# EAGLE board 16x16_3mm_3.2x3.2_skewed_headers_multiplexed (EAGLE 6.0)
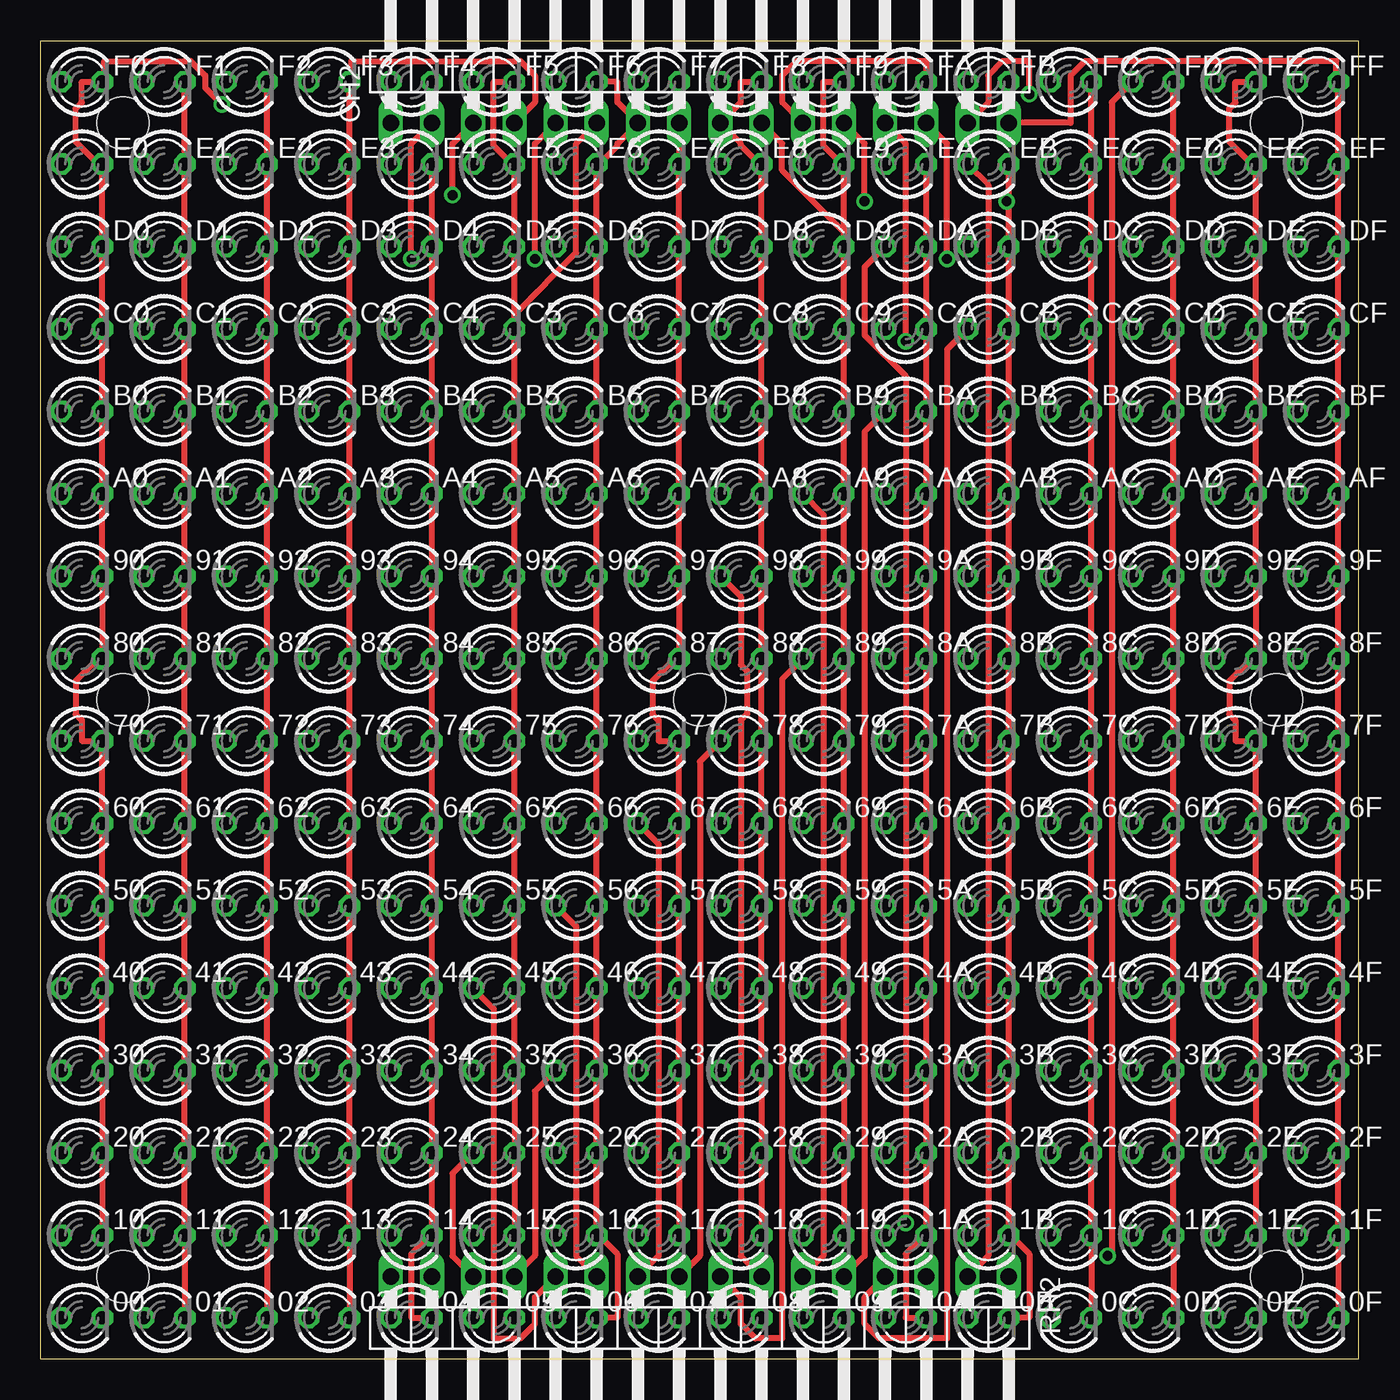
[diagram p0: board, top side]
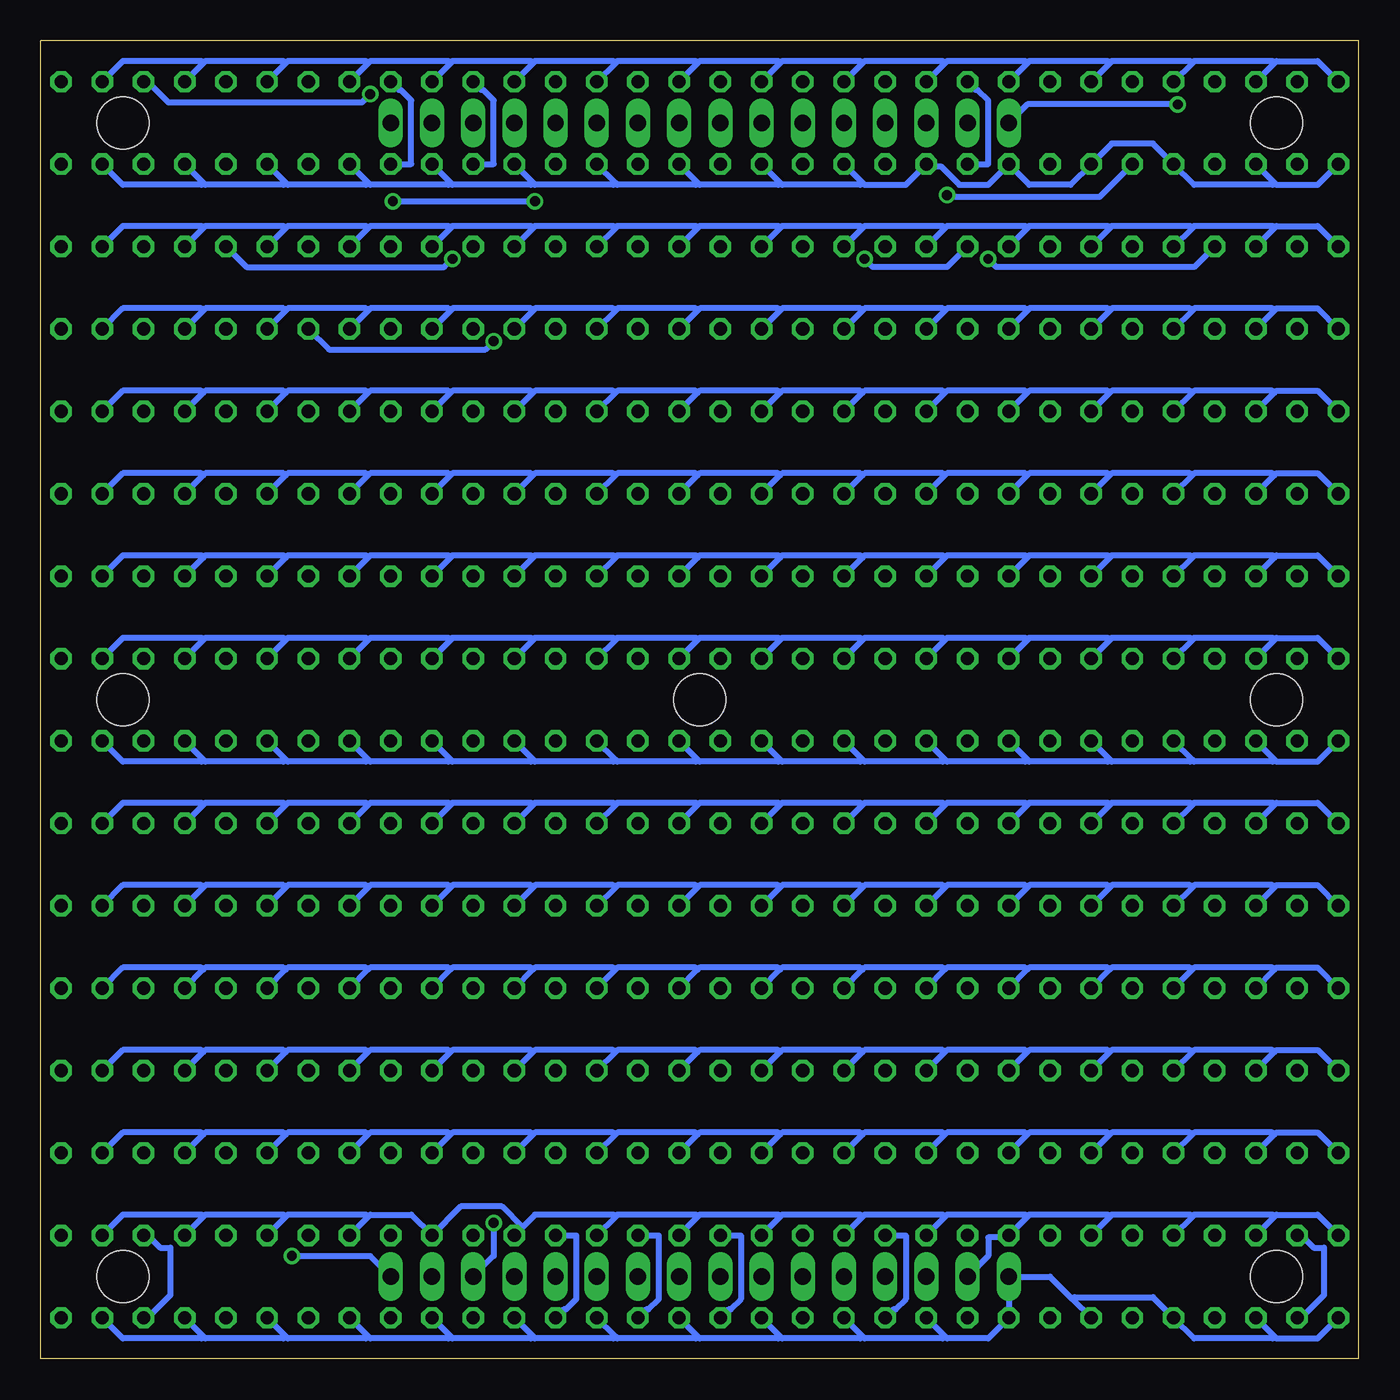
[diagram p1: board, bottom side, seen from below]

Size 81.28 x 81.28 mm. Coordinates in mm from the lower left corner, seen from the top.
Outline: 0,0 0,81.28 81.28,81.28 81.28,0 0,0
Copper layers (1*16): Top 0.035mm / dielectric 1.5mm / Bottom 0.035mm
Design rules: minimum track width 15mil, minimum drill 24mil, track to track 12mil, track to pad 12mil, pad to pad 8mil, via to via 8mil, smd to smd 8mil, copper to edge 40mil, drill to drill 8mil, minimum pad ring 10mil, minimum via ring 8mil, stop-mask expansion 4mil, vias tented up to drill 0mil, thermal gap 10mil
Holes 3.2 mm at 5.08,76.2 76.2,76.2 76.2,5.08 5.08,5.08 5.08,40.64 76.2,40.64 40.64,40.64

## Footprints (pad centres in the part's own frame; a part is rotated, then mirrored left to right if it is on the bottom)
LED3MM = drill 0.813 octagon: A -1.27,0; K 1.27,0
1X16/90 = drill 1.016 long: 1 -19.05,-3.81; 2 -16.51,-3.81; 3 -13.97,-3.81; 4 -11.43,-3.81; 5 -8.89,-3.81; 6 -6.35,-3.81; 7 -3.81,-3.81; 8 -1.27,-3.81; 9 1.27,-3.81; 10 3.81,-3.81; 11 6.35,-3.81; 12 8.89,-3.81; 13 11.43,-3.81; 14 13.97,-3.81; 15 16.51,-3.81; 16 19.05,-3.81

## Placement (x,y rotation side)
00  [LED3MM]  2.54,2.54 0 top
0A  [LED3MM]  53.34,2.54 0 top
0B  [LED3MM]  58.42,2.54 0 top
0C  [LED3MM]  63.5,2.54 0 top
0D  [LED3MM]  68.58,2.54 0 top
0E  [LED3MM]  73.66,2.54 0 top
0F  [LED3MM]  78.74,2.54 0 top
01  [LED3MM]  7.62,2.54 0 top
1A  [LED3MM]  53.34,7.62 0 top
1B  [LED3MM]  58.42,7.62 0 top
1C  [LED3MM]  63.5,7.62 0 top
1D  [LED3MM]  68.58,7.62 0 top
1E  [LED3MM]  73.66,7.62 0 top
1F  [LED3MM]  78.74,7.62 0 top
02  [LED3MM]  12.7,2.54 0 top
2A  [LED3MM]  53.34,12.7 0 top
2B  [LED3MM]  58.42,12.7 0 top
2C  [LED3MM]  63.5,12.7 0 top
2D  [LED3MM]  68.58,12.7 0 top
2E  [LED3MM]  73.66,12.7 0 top
2F  [LED3MM]  78.74,12.7 0 top
03  [LED3MM]  17.78,2.54 0 top
3A  [LED3MM]  53.34,17.78 0 top
3B  [LED3MM]  58.42,17.78 0 top
3C  [LED3MM]  63.5,17.78 0 top
3D  [LED3MM]  68.58,17.78 0 top
3E  [LED3MM]  73.66,17.78 0 top
3F  [LED3MM]  78.74,17.78 0 top
04  [LED3MM]  22.86,2.54 0 top
4A  [LED3MM]  53.34,22.86 0 top
4B  [LED3MM]  58.42,22.86 0 top
4C  [LED3MM]  63.5,22.86 0 top
4D  [LED3MM]  68.58,22.86 0 top
4E  [LED3MM]  73.66,22.86 0 top
4F  [LED3MM]  78.74,22.86 0 top
05  [LED3MM]  27.94,2.54 0 top
5A  [LED3MM]  53.34,27.94 0 top
5B  [LED3MM]  58.42,27.94 0 top
5C  [LED3MM]  63.5,27.94 0 top
5D  [LED3MM]  68.58,27.94 0 top
5E  [LED3MM]  73.66,27.94 0 top
5F  [LED3MM]  78.74,27.94 0 top
06  [LED3MM]  33.02,2.54 0 top
6A  [LED3MM]  53.34,33.02 0 top
6B  [LED3MM]  58.42,33.02 0 top
6C  [LED3MM]  63.5,33.02 0 top
6D  [LED3MM]  68.58,33.02 0 top
6E  [LED3MM]  73.66,33.02 0 top
6F  [LED3MM]  78.74,33.02 0 top
07  [LED3MM]  38.1,2.54 0 top
7A  [LED3MM]  53.34,38.1 0 top
7B  [LED3MM]  58.42,38.1 0 top
7C  [LED3MM]  63.5,38.1 0 top
7D  [LED3MM]  68.58,38.1 0 top
7E  [LED3MM]  73.66,38.1 0 top
7F  [LED3MM]  78.74,38.1 0 top
08  [LED3MM]  43.18,2.54 0 top
8A  [LED3MM]  53.34,43.18 0 top
8B  [LED3MM]  58.42,43.18 0 top
8C  [LED3MM]  63.5,43.18 0 top
8D  [LED3MM]  68.58,43.18 0 top
8E  [LED3MM]  73.66,43.18 0 top
8F  [LED3MM]  78.74,43.18 0 top
09  [LED3MM]  48.26,2.54 0 top
9A  [LED3MM]  53.34,48.26 0 top
9B  [LED3MM]  58.42,48.26 0 top
9C  [LED3MM]  63.5,48.26 0 top
9D  [LED3MM]  68.58,48.26 0 top
9E  [LED3MM]  73.66,48.26 0 top
9F  [LED3MM]  78.74,48.26 0 top
10  [LED3MM]  2.54,7.62 0 top
11  [LED3MM]  7.62,7.62 0 top
12  [LED3MM]  12.7,7.62 0 top
13  [LED3MM]  17.78,7.62 0 top
14  [LED3MM]  22.86,7.62 0 top
15  [LED3MM]  27.94,7.62 0 top
16  [LED3MM]  33.02,7.62 0 top
17  [LED3MM]  38.1,7.62 0 top
18  [LED3MM]  43.18,7.62 0 top
19  [LED3MM]  48.26,7.62 0 top
20  [LED3MM]  2.54,12.7 0 top
21  [LED3MM]  7.62,12.7 0 top
22  [LED3MM]  12.7,12.7 0 top
23  [LED3MM]  17.78,12.7 0 top
24  [LED3MM]  22.86,12.7 0 top
25  [LED3MM]  27.94,12.7 0 top
26  [LED3MM]  33.02,12.7 0 top
27  [LED3MM]  38.1,12.7 0 top
28  [LED3MM]  43.18,12.7 0 top
29  [LED3MM]  48.26,12.7 0 top
30  [LED3MM]  2.54,17.78 0 top
31  [LED3MM]  7.62,17.78 0 top
32  [LED3MM]  12.7,17.78 0 top
33  [LED3MM]  17.78,17.78 0 top
34  [LED3MM]  22.86,17.78 0 top
35  [LED3MM]  27.94,17.78 0 top
36  [LED3MM]  33.02,17.78 0 top
37  [LED3MM]  38.1,17.78 0 top
38  [LED3MM]  43.18,17.78 0 top
39  [LED3MM]  48.26,17.78 0 top
40  [LED3MM]  2.54,22.86 0 top
41  [LED3MM]  7.62,22.86 0 top
42  [LED3MM]  12.7,22.86 0 top
43  [LED3MM]  17.78,22.86 0 top
44  [LED3MM]  22.86,22.86 0 top
45  [LED3MM]  27.94,22.86 0 top
46  [LED3MM]  33.02,22.86 0 top
47  [LED3MM]  38.1,22.86 0 top
48  [LED3MM]  43.18,22.86 0 top
49  [LED3MM]  48.26,22.86 0 top
50  [LED3MM]  2.54,27.94 0 top
51  [LED3MM]  7.62,27.94 0 top
52  [LED3MM]  12.7,27.94 0 top
53  [LED3MM]  17.78,27.94 0 top
54  [LED3MM]  22.86,27.94 0 top
55  [LED3MM]  27.94,27.94 0 top
56  [LED3MM]  33.02,27.94 0 top
57  [LED3MM]  38.1,27.94 0 top
58  [LED3MM]  43.18,27.94 0 top
59  [LED3MM]  48.26,27.94 0 top
60  [LED3MM]  2.54,33.02 0 top
61  [LED3MM]  7.62,33.02 0 top
62  [LED3MM]  12.7,33.02 0 top
63  [LED3MM]  17.78,33.02 0 top
64  [LED3MM]  22.86,33.02 0 top
65  [LED3MM]  27.94,33.02 0 top
66  [LED3MM]  33.02,33.02 0 top
67  [LED3MM]  38.1,33.02 0 top
68  [LED3MM]  43.18,33.02 0 top
69  [LED3MM]  48.26,33.02 0 top
70  [LED3MM]  2.54,38.1 0 top
71  [LED3MM]  7.62,38.1 0 top
72  [LED3MM]  12.7,38.1 0 top
73  [LED3MM]  17.78,38.1 0 top
74  [LED3MM]  22.86,38.1 0 top
75  [LED3MM]  27.94,38.1 0 top
76  [LED3MM]  33.02,38.1 0 top
77  [LED3MM]  38.1,38.1 0 top
78  [LED3MM]  43.18,38.1 0 top
79  [LED3MM]  48.26,38.1 0 top
80  [LED3MM]  2.54,43.18 0 top
81  [LED3MM]  7.62,43.18 0 top
82  [LED3MM]  12.7,43.18 0 top
83  [LED3MM]  17.78,43.18 0 top
84  [LED3MM]  22.86,43.18 0 top
85  [LED3MM]  27.94,43.18 0 top
86  [LED3MM]  33.02,43.18 0 top
87  [LED3MM]  38.1,43.18 0 top
88  [LED3MM]  43.18,43.18 0 top
89  [LED3MM]  48.26,43.18 0 top
90  [LED3MM]  2.54,48.26 0 top
91  [LED3MM]  7.62,48.26 0 top
92  [LED3MM]  12.7,48.26 0 top
93  [LED3MM]  17.78,48.26 0 top
94  [LED3MM]  22.86,48.26 0 top
95  [LED3MM]  27.94,48.26 0 top
96  [LED3MM]  33.02,48.26 0 top
97  [LED3MM]  38.1,48.26 0 top
98  [LED3MM]  43.18,48.26 0 top
99  [LED3MM]  48.26,48.26 0 top
A0  [LED3MM]  2.54,53.34 0 top
A1  [LED3MM]  7.62,53.34 0 top
A2  [LED3MM]  12.7,53.34 0 top
A3  [LED3MM]  17.78,53.34 0 top
A4  [LED3MM]  22.86,53.34 0 top
A5  [LED3MM]  27.94,53.34 0 top
A6  [LED3MM]  33.02,53.34 0 top
A7  [LED3MM]  38.1,53.34 0 top
A8  [LED3MM]  43.18,53.34 0 top
A9  [LED3MM]  48.26,53.34 0 top
AA  [LED3MM]  53.34,53.34 0 top
AB  [LED3MM]  58.42,53.34 0 top
AC  [LED3MM]  63.5,53.34 0 top
AD  [LED3MM]  68.58,53.34 0 top
AE  [LED3MM]  73.66,53.34 0 top
AF  [LED3MM]  78.74,53.34 0 top
B0  [LED3MM]  2.54,58.42 0 top
B1  [LED3MM]  7.62,58.42 0 top
B2  [LED3MM]  12.7,58.42 0 top
B3  [LED3MM]  17.78,58.42 0 top
B4  [LED3MM]  22.86,58.42 0 top
B5  [LED3MM]  27.94,58.42 0 top
B6  [LED3MM]  33.02,58.42 0 top
B7  [LED3MM]  38.1,58.42 0 top
B8  [LED3MM]  43.18,58.42 0 top
B9  [LED3MM]  48.26,58.42 0 top
BA  [LED3MM]  53.34,58.42 0 top
BB  [LED3MM]  58.42,58.42 0 top
BC  [LED3MM]  63.5,58.42 0 top
BD  [LED3MM]  68.58,58.42 0 top
BE  [LED3MM]  73.66,58.42 0 top
BF  [LED3MM]  78.74,58.42 0 top
C0  [LED3MM]  2.54,63.5 0 top
C1  [LED3MM]  7.62,63.5 0 top
C2  [LED3MM]  12.7,63.5 0 top
C3  [LED3MM]  17.78,63.5 0 top
C4  [LED3MM]  22.86,63.5 0 top
C5  [LED3MM]  27.94,63.5 0 top
C6  [LED3MM]  33.02,63.5 0 top
C7  [LED3MM]  38.1,63.5 0 top
C8  [LED3MM]  43.18,63.5 0 top
C9  [LED3MM]  48.26,63.5 0 top
CA  [LED3MM]  53.34,63.5 0 top
CB  [LED3MM]  58.42,63.5 0 top
CC  [LED3MM]  63.5,63.5 0 top
CD  [LED3MM]  68.58,63.5 0 top
CE  [LED3MM]  73.66,63.5 0 top
CF  [LED3MM]  78.74,63.5 0 top
CH2  [1X16/90]  40.64,80.01 0 top
D0  [LED3MM]  2.54,68.58 0 top
D1  [LED3MM]  7.62,68.58 0 top
D2  [LED3MM]  12.7,68.58 0 top
D3  [LED3MM]  17.78,68.58 0 top
D4  [LED3MM]  22.86,68.58 0 top
D5  [LED3MM]  27.94,68.58 0 top
D6  [LED3MM]  33.02,68.58 0 top
D7  [LED3MM]  38.1,68.58 0 top
D8  [LED3MM]  43.18,68.58 0 top
D9  [LED3MM]  48.26,68.58 0 top
DA  [LED3MM]  53.34,68.58 0 top
DB  [LED3MM]  58.42,68.58 0 top
DC  [LED3MM]  63.5,68.58 0 top
DD  [LED3MM]  68.58,68.58 0 top
DE  [LED3MM]  73.66,68.58 0 top
DF  [LED3MM]  78.74,68.58 0 top
E0  [LED3MM]  2.54,73.66 0 top
E1  [LED3MM]  7.62,73.66 0 top
E2  [LED3MM]  12.7,73.66 0 top
E3  [LED3MM]  17.78,73.66 0 top
E4  [LED3MM]  22.86,73.66 0 top
E5  [LED3MM]  27.94,73.66 0 top
E6  [LED3MM]  33.02,73.66 0 top
E7  [LED3MM]  38.1,73.66 0 top
E8  [LED3MM]  43.18,73.66 0 top
E9  [LED3MM]  48.26,73.66 0 top
EA  [LED3MM]  53.34,73.66 0 top
EB  [LED3MM]  58.42,73.66 0 top
EC  [LED3MM]  63.5,73.66 0 top
ED  [LED3MM]  68.58,73.66 0 top
EE  [LED3MM]  73.66,73.66 0 top
EF  [LED3MM]  78.74,73.66 0 top
F0  [LED3MM]  2.54,78.74 0 top
F1  [LED3MM]  7.62,78.74 0 top
F2  [LED3MM]  12.7,78.74 0 top
F3  [LED3MM]  17.78,78.74 0 top
F4  [LED3MM]  22.86,78.74 0 top
F5  [LED3MM]  27.94,78.74 0 top
F6  [LED3MM]  33.02,78.74 0 top
F7  [LED3MM]  38.1,78.74 0 top
F8  [LED3MM]  43.18,78.74 0 top
F9  [LED3MM]  48.26,78.74 0 top
FA  [LED3MM]  53.34,78.74 0 top
FB  [LED3MM]  58.42,78.74 0 top
FC  [LED3MM]  63.5,78.74 0 top
FD  [LED3MM]  68.58,78.74 0 top
FE  [LED3MM]  73.66,78.74 0 top
FF  [LED3MM]  78.74,78.74 0 top
RH2  [1X16/90]  40.64,1.27 180 top

## Library data of the parts
00 0A 0B 0C 0D 0E 0F 01 1A 1B 1C 1D 1E 1F 02 2A 2B 2C 2D 2E 2F 03 3A 3B 3C 3D 3E 3F 04 4A 4B 4C 4D 4E 4F 05 5A 5B 5C 5D 5E 5F 06 6A 6B 6C 6D 6E 6F 07 7A 7B 7C 7D 7E 7F 08 8A 8B 8C 8D 8E 8F 09 9A 9B 9C 9D 9E 9F 10-99 A0 A1-A9 AA AB AC AD AE AF B0 B1-B9 BA BB BC BD BE BF C0 C1-C9 CA CB CC CD CE CF D0 D1-D9 DA DB DC DD DE DF E0 E1-E9 EA EB EC ED EE EF F0 F1-F9 FA FB FC FD FE FF = led
CH2 RH2 = pinhead

## Nets
C0: 00.K 10.K 20.K 30.K 40.K 50.K 60.K 70.K 80.K 90.K A0.K B0.K C0.K CH2.1 D0.K E0.K F0.K
C1: 01.K 11.K 21.K 31.K 41.K 51.K 61.K 71.K 81.K 91.K A1.K B1.K C1.K CH2.2 D1.K E1.K F1.K
C2: 02.K 12.K 22.K 32.K 42.K 52.K 62.K 72.K 82.K 92.K A2.K B2.K C2.K CH2.3 D2.K E2.K F2.K
C3: 03.K 13.K 23.K 33.K 43.K 53.K 63.K 73.K 83.K 93.K A3.K B3.K C3.K CH2.4 D3.K E3.K F3.K
C4: 04.K 14.K 24.K 34.K 44.K 54.K 64.K 74.K 84.K 94.K A4.K B4.K C4.K CH2.5 D4.K E4.K F4.K
C5: 05.K 15.K 25.K 35.K 45.K 55.K 65.K 75.K 85.K 95.K A5.K B5.K C5.K CH2.6 D5.K E5.K F5.K
C6: 06.K 16.K 26.K 36.K 46.K 56.K 66.K 76.K 86.K 96.K A6.K B6.K C6.K CH2.7 D6.K E6.K F6.K
C7: 07.K 17.K 27.K 37.K 47.K 57.K 67.K 77.K 87.K 97.K A7.K B7.K C7.K CH2.8 D7.K E7.K F7.K
C8: 08.K 18.K 28.K 38.K 48.K 58.K 68.K 78.K 88.K 98.K A8.K B8.K C8.K CH2.9 D8.K E8.K F8.K
C9: 09.K 19.K 29.K 39.K 49.K 59.K 69.K 79.K 89.K 99.K A9.K B9.K C9.K CH2.10 D9.K E9.K F9.K
C10: 0A.K 1A.K 2A.K 3A.K 4A.K 5A.K 6A.K 7A.K 8A.K 9A.K AA.K BA.K CA.K CH2.11 DA.K EA.K FA.K
C11: 0B.K 1B.K 2B.K 3B.K 4B.K 5B.K 6B.K 7B.K 8B.K 9B.K AB.K BB.K CB.K CH2.12 DB.K EB.K FB.K
C12: 0C.K 1C.K 2C.K 3C.K 4C.K 5C.K 6C.K 7C.K 8C.K 9C.K AC.K BC.K CC.K CH2.13 DC.K EC.K FC.K
C13: 0D.K 1D.K 2D.K 3D.K 4D.K 5D.K 6D.K 7D.K 8D.K 9D.K AD.K BD.K CD.K CH2.14 DD.K ED.K FD.K
C14: 0E.K 1E.K 2E.K 3E.K 4E.K 5E.K 6E.K 7E.K 8E.K 9E.K AE.K BE.K CE.K CH2.15 DE.K EE.K FE.K
C15: 0F.K 1F.K 2F.K 3F.K 4F.K 5F.K 6F.K 7F.K 8F.K 9F.K AF.K BF.K CF.K CH2.16 DF.K EF.K FF.K
R0: 00.A 0A.A 0B.A 0C.A 0D.A 0E.A 0F.A 01.A 02.A 03.A 04.A 05.A 06.A 07.A 08.A 09.A RH2.16
R1: 1A.A 1B.A 1C.A 1D.A 1E.A 1F.A 10.A 11.A 12.A 13.A 14.A 15.A 16.A 17.A 18.A 19.A RH2.15
R2: 2A.A 2B.A 2C.A 2D.A 2E.A 2F.A 20.A 21.A 22.A 23.A 24.A 25.A 26.A 27.A 28.A 29.A RH2.14
R3: 3A.A 3B.A 3C.A 3D.A 3E.A 3F.A 30.A 31.A 32.A 33.A 34.A 35.A 36.A 37.A 38.A 39.A RH2.13
R4: 4A.A 4B.A 4C.A 4D.A 4E.A 4F.A 40.A 41.A 42.A 43.A 44.A 45.A 46.A 47.A 48.A 49.A RH2.12
R5: 5A.A 5B.A 5C.A 5D.A 5E.A 5F.A 50.A 51.A 52.A 53.A 54.A 55.A 56.A 57.A 58.A 59.A RH2.11
R6: 6A.A 6B.A 6C.A 6D.A 6E.A 6F.A 60.A 61.A 62.A 63.A 64.A 65.A 66.A 67.A 68.A 69.A RH2.10
R7: 7A.A 7B.A 7C.A 7D.A 7E.A 7F.A 70.A 71.A 72.A 73.A 74.A 75.A 76.A 77.A 78.A 79.A RH2.9
R8: 8A.A 8B.A 8C.A 8D.A 8E.A 8F.A 80.A 81.A 82.A 83.A 84.A 85.A 86.A 87.A 88.A 89.A RH2.8
R9: 9A.A 9B.A 9C.A 9D.A 9E.A 9F.A 90.A 91.A 92.A 93.A 94.A 95.A 96.A 97.A 98.A 99.A RH2.7
R10: A0.A A1.A A2.A A3.A A4.A A5.A A6.A A7.A A8.A A9.A AA.A AB.A AC.A AD.A AE.A AF.A RH2.6
R11: B0.A B1.A B2.A B3.A B4.A B5.A B6.A B7.A B8.A B9.A BA.A BB.A BC.A BD.A BE.A BF.A RH2.5
R12: C0.A C1.A C2.A C3.A C4.A C5.A C6.A C7.A C8.A C9.A CA.A CB.A CC.A CD.A CE.A CF.A RH2.4
R13: D0.A D1.A D2.A D3.A D4.A D5.A D6.A D7.A D8.A D9.A DA.A DB.A DC.A DD.A DE.A DF.A RH2.3
R14: E0.A E1.A E2.A E3.A E4.A E5.A E6.A E7.A E8.A E9.A EA.A EB.A EC.A ED.A EE.A EF.A RH2.2
R15: F0.A F1.A F2.A F3.A F4.A F5.A F6.A F7.A F8.A F9.A FA.A FB.A FC.A FD.A FE.A FF.A RH2.1

## Tracks (layer width: path | path; a pad name or v marks a point on that pad's centre or on a via)
C0  (via drill 0.61)
  Top 0.381: 10.K 20.K 30.K 40.K 50.K 60.K 70.K 2.54,38.1 2.54,39.37 2.16,39.75 2.16,41.78 3.68,43.31 80.K 90.K A0.K B0.K C0.K D0.K E0.K 3.68,73.53 2.16,75.06 2.16,77.09 2.54,77.47 2.54,78.74 F0.K 3.94,78.87 3.94,80.01 9.27,80.01 10.16,79.12 10.16,78.36 v11.18,77.34
  Bottom 0.381: 00.K 3.56,2.54 2.16,3.94 2.16,6.86 2.79,6.86 3.56,7.62 10.K | CH2.1 20.45,77.34 v11.18,77.34
C1  (via drill 0.61)
  Top 0.381: 01.K 11.K 21.K 31.K 41.K 51.K 61.K 71.K 81.K 91.K A1.K B1.K C1.K D1.K E1.K F1.K | CH2.2 22.86,74.93 v22.86,67.82
  Bottom 0.381: v22.86,67.82 22.35,67.31 10.16,67.31 D1.K
C2  (via drill 0.61)
  Top 0.381: 02.K 12.K 22.K 32.K 42.K 52.K 62.K 72.K 82.K 92.K A2.K B2.K C2.K D2.K E2.K F2.K | CH2.3 25.4,74.93 v25.4,71.75
  Bottom 0.381: v25.4,71.75 25.27,71.63 16,71.63 E2.K
C3
  Top 0.381: 03.K 13.K 23.K 33.K 43.K 53.K 63.K 73.K 83.K 93.K A3.K B3.K C3.K D3.K E3.K F3.K 19.18,78.87 19.18,80.01 29.59,80.01 30.48,79.12 30.48,77.47 CH2.4
C4  (via drill 0.61)
  Top 0.381: 04.K 22.86,2.54 22.86,6.48 24,7.62 14.K 24.K 34.K 44.K 54.K 64.K 74.K 84.K 94.K A4.K B4.K C4.K D4.K E4.K | CH2.5 30.48,74.93 v30.48,67.82
  Bottom 0.381: F4.K 23.62,78.23 23.5,78.23 22.86,77.6 22.86,73.66 E4.K | v30.48,67.82 29.97,67.31 25.4,67.31 D4.K
C5
  Top 0.381: 29.21,64.52 C5.K B5.K A5.K 95.K 85.K 75.K 65.K 55.K 45.K 35.K 25.K 15.K | 29.21,64.52 D5.K E5.K 29.08,73.66 27.94,74.8 27.94,78.74 F5.K | CH2.6 33.02,74.93 33.02,68.2 29.34,64.52 29.21,64.52
  Bottom 0.381: 05.K 28.7,3.05 28.57,3.05 27.94,3.68 27.94,7.62 15.K
C6
  Top 0.381: F6.K 35.56,78.74 35.56,77.47 CH2.7 35.56,74.93 35.56,74.8 34.42,73.66 E6.K D6.K C6.K B6.K A6.K 96.K 86.K 76.K 66.K 56.K 46.K 36.K 26.K 16.K 34.42,7.62 35.56,6.48 35.56,2.54 06.K
C7
  Top 0.381: 17.K 27.K 37.K 47.K 57.K 67.K 77.K 38.1,38.1 38.1,39.37 37.72,39.75 37.72,41.78 39.24,43.31 87.K 97.K A7.K B7.K C7.K D7.K E7.K CH2.8 F7.K
  Bottom 0.381: 07.K 38.86,3.05 38.73,3.05 38.1,3.68 38.1,7.62 17.K
C8
  Top 0.381: F8.K 43.18,78.74 43.18,77.47 CH2.9 43.18,74.93 43.18,74.8 44.32,73.66 E8.K D8.K C8.K B8.K A8.K 98.K 88.K 78.K 68.K 58.K 48.K 38.K 28.K 18.K
  Bottom 0.381: 08.K 43.94,3.05 43.81,3.05 43.18,3.68 43.18,7.62 18.K
C9
  Top 0.381: 49.53,69.6 D9.K C9.K B9.K A9.K 99.K 89.K 79.K 69.K 59.K 49.K 39.K 29.K 19.K | 49.53,69.6 E9.K 49.4,73.66 48.26,74.8 48.26,78.74 F9.K | CH2.10 45.72,74.93 45.72,73.28 49.4,69.6 49.53,69.6
  Bottom 0.381: 09.K 49.02,3.05 48.9,3.05 48.26,3.68 48.26,7.62 19.K
C10
  Top 0.381: 0A.K 53.34,2.54 53.34,6.48 54.48,7.62 1A.K 2A.K 3A.K 4A.K 5A.K 6A.K 7A.K 8A.K 9A.K AA.K BA.K CA.K DA.K EA.K | CH2.11 45.72,77.47 45.72,79.12 46.61,80.01 54.61,80.01 FA.K
  Bottom 0.381: FA.K 54.1,78.23 53.98,78.23 53.34,77.6 53.34,73.66 EA.K
C11  (via drill 0.61)
  Top 0.381: 0B.K 60.96,2.54 60.96,6.48 59.82,7.62 1B.K 2B.K 3B.K 4B.K 5B.K 6B.K 7B.K 8B.K 9B.K AB.K BB.K CB.K DB.K 59.69,71.37 | 59.69,71.37 EB.K | CH2.12 50.8,74.93 v50.8,71.37 | v59.56,71.37 59.69,71.37
  Bottom 0.381: FB.K 59.18,78.23 59.05,78.23 58.42,77.6 58.42,73.66 EB.K | v59.56,71.37 v50.8,71.37
C12  (via drill 0.61)
  Top 0.381: 0C.K 1C.K 2C.K 3C.K 4C.K 5C.K 6C.K 7C.K 8C.K 9C.K AC.K BC.K CC.K DC.K EC.K FC.K | CH2.13 53.34,74.93 v53.34,62.74
  Bottom 0.381: v53.34,62.74 53.85,62.23 63.5,62.23 CC.K
C13  (via drill 0.61)
  Top 0.381: 0D.K 1D.K 2D.K 3D.K 4D.K 5D.K 6D.K 7D.K 8D.K 9D.K AD.K BD.K CD.K DD.K ED.K FD.K | CH2.14 55.88,74.93 v55.88,67.82
  Bottom 0.381: v55.88,67.82 56.39,67.31 68.58,67.31 DD.K
C14  (via drill 0.61)
  Top 0.381: 1E.K 2E.K 3E.K 4E.K 5E.K 6E.K 7E.K 73.66,38.1 73.66,39.37 73.28,39.75 73.28,41.78 74.8,43.31 8E.K 9E.K AE.K BE.K CE.K DE.K EE.K 74.8,73.53 73.28,75.06 73.28,77.09 73.66,77.47 73.66,78.74 FE.K | CH2.15 58.42,77.47 58.42,79.12 59.31,80.01 60.96,80.01 v60.96,77.98
  Bottom 0.381: 0E.K 74.68,2.54 73.28,3.94 73.28,6.86 73.91,6.86 74.68,7.62 1E.K | v60.96,77.98 61.47,77.47 73.41,77.47 74.68,78.74 FE.K
C15
  Top 0.381: 0F.K 1F.K 2F.K 3F.K 4F.K 5F.K 6F.K 7F.K 8F.K 9F.K AF.K BF.K CF.K DF.K EF.K FF.K 79.88,78.87 79.88,80.01 64.39,80.01 63.5,79.12 63.5,76.2 CH2.16
R0
  Bottom 0.381: 00.A 2.54,1.27 5.08,1.27 5.21,1.4 | 01.A 5.21,1.4 | 5.21,1.4 5.33,1.27 10.16,1.27 02.A 12.7,3.81 17.53,3.81 17.65,3.68 | 17.65,3.68 19.05,5.08 RH2.16 04.A 22.86,1.27 25.4,1.27 25.53,1.4 | 17.65,3.68 03.A | 25.53,1.4 05.A | 30.61,1.4 30.48,1.27 25.65,1.27 25.53,1.4 | 30.61,1.4 06.A | 35.69,1.4 35.56,1.27 30.73,1.27 30.61,1.4 | 35.69,1.4 07.A | 40.77,1.4 40.64,1.27 35.81,1.27 35.69,1.4 | 40.77,1.4 08.A | 45.85,1.4 45.72,1.27 40.89,1.27 40.77,1.4 | 45.85,1.4 09.A | 50.93,1.4 50.8,1.27 45.97,1.27 45.85,1.4 | 50.93,1.4 0A.A | 56.01,1.4 55.88,1.27 51.05,1.27 50.93,1.4 | 56.01,1.4 0B.A | 61.09,1.4 60.96,1.27 56.13,1.27 56.01,1.4 | 61.09,1.4 0C.A | 66.17,1.4 66.04,1.27 61.21,1.27 61.09,1.4 | 66.17,1.4 0D.A | 71.25,1.4 71.12,1.27 66.29,1.27 66.17,1.4 | 71.25,1.4 0E.A | 0F.A 76.2,1.27 71.37,1.27 71.25,1.4
R1
  Bottom 0.381: 1C.A 61.09,8.76 | 61.09,8.76 60.96,8.89 58.42,8.89 1B.A 55.37,9.4 52.83,9.4 51.56,8.13 | 66.17,8.76 66.04,8.89 61.21,8.89 61.09,8.76 | 66.17,8.76 1D.A | 71.25,8.76 71.12,8.89 66.29,8.89 66.17,8.76 | 71.25,8.76 1E.A | 1F.A 76.2,8.89 71.37,8.89 71.25,8.76 | 10.A 2.54,8.89 5.08,8.89 5.21,8.76 | 11.A 5.21,8.76 | 10.29,8.76 10.16,8.89 5.33,8.89 5.21,8.76 | 10.29,8.76 12.A | 15.37,8.76 15.24,8.89 10.41,8.89 10.29,8.76 | 15.37,8.76 13.A | 20.45,8.76 20.32,8.89 15.49,8.89 15.37,8.76 | 20.45,8.76 14.A 21.72,7.49 22.86,7.49 22.86,6.35 RH2.15 | 25.53,8.76 25.4,8.89 20.57,8.89 20.45,8.76 | 25.53,8.76 15.A | 30.61,8.76 30.48,8.89 25.65,8.89 25.53,8.76 | 30.61,8.76 16.A | 35.69,8.76 35.56,8.89 30.73,8.89 30.61,8.76 | 35.69,8.76 17.A | 40.77,8.76 40.64,8.89 35.81,8.89 35.69,8.76 | 40.77,8.76 18.A | 45.85,8.76 45.72,8.89 40.89,8.89 40.77,8.76 | 45.85,8.76 19.A | 51.56,8.13 50.8,8.89 45.97,8.89 45.85,8.76 | 51.56,8.13 1A.A
R2
  Top 0.381: RH2.14 25.4,6.35 25.4,11.43 25.A
  Bottom 0.381: 20.A 2.54,13.97 5.08,13.97 5.21,13.84 | 21.A 5.21,13.84 | 10.29,13.84 10.16,13.97 5.33,13.97 5.21,13.84 | 10.29,13.84 22.A | 15.37,13.84 15.24,13.97 10.41,13.97 10.29,13.84 | 15.37,13.84 23.A | 20.45,13.84 20.32,13.97 15.49,13.97 15.37,13.84 | 20.45,13.84 24.A | 25.53,13.84 25.4,13.97 20.57,13.97 20.45,13.84 | 25.53,13.84 25.A | 30.61,13.84 30.48,13.97 25.65,13.97 25.53,13.84 | 30.61,13.84 26.A | 35.69,13.84 35.56,13.97 30.73,13.97 30.61,13.84 | 35.69,13.84 27.A | 40.77,13.84 40.64,13.97 35.81,13.97 35.69,13.84 | 40.77,13.84 28.A | 45.85,13.84 45.72,13.97 40.89,13.97 40.77,13.84 | 45.85,13.84 29.A | 50.93,13.84 50.8,13.97 45.97,13.97 45.85,13.84 | 50.93,13.84 2A.A | 56.01,13.84 55.88,13.97 51.05,13.97 50.93,13.84 | 56.01,13.84 2B.A | 61.09,13.84 60.96,13.97 56.13,13.97 56.01,13.84 | 61.09,13.84 2C.A | 66.17,13.84 66.04,13.97 61.21,13.97 61.09,13.84 | 66.17,13.84 2D.A | 71.25,13.84 71.12,13.97 66.29,13.97 66.17,13.84 | 71.25,13.84 2E.A | 2F.A 76.2,13.97 71.37,13.97 71.25,13.84
R3
  Top 0.381: RH2.13 30.48,6.35 30.48,16.51 36.A
  Bottom 0.381: 30.A 2.54,19.05 5.08,19.05 5.21,18.92 | 31.A 5.21,18.92 | 10.29,18.92 10.16,19.05 5.33,19.05 5.21,18.92 | 10.29,18.92 32.A | 15.37,18.92 15.24,19.05 10.41,19.05 10.29,18.92 | 15.37,18.92 33.A | 20.45,18.92 20.32,19.05 15.49,19.05 15.37,18.92 | 20.45,18.92 34.A | 25.53,18.92 25.4,19.05 20.57,19.05 20.45,18.92 | 25.53,18.92 35.A | 30.61,18.92 30.48,19.05 25.65,19.05 25.53,18.92 | 30.61,18.92 36.A | 35.69,18.92 35.56,19.05 30.73,19.05 30.61,18.92 | 35.69,18.92 37.A | 40.77,18.92 40.64,19.05 35.81,19.05 35.69,18.92 | 40.77,18.92 38.A | 45.85,18.92 45.72,19.05 40.89,19.05 40.77,18.92 | 45.85,18.92 39.A | 50.93,18.92 50.8,19.05 45.97,19.05 45.85,18.92 | 50.93,18.92 3A.A | 56.01,18.92 55.88,19.05 51.05,19.05 50.93,18.92 | 56.01,18.92 3B.A | 61.09,18.92 60.96,19.05 56.13,19.05 56.01,18.92 | 61.09,18.92 3C.A | 66.17,18.92 66.04,19.05 61.21,19.05 61.09,18.92 | 66.17,18.92 3D.A | 71.25,18.92 71.12,19.05 66.29,19.05 66.17,18.92 | 71.25,18.92 3E.A | 3F.A 76.2,19.05 71.37,19.05 71.25,18.92
R4
  Top 0.381: RH2.12 30.48,3.81 30.48,2.16 29.59,1.27 27.94,1.27 27.94,21.59 45.A
  Bottom 0.381: 40.A 2.54,24.13 5.08,24.13 5.21,24 | 41.A 5.21,24 | 10.29,24 10.16,24.13 5.33,24.13 5.21,24 | 10.29,24 42.A | 15.37,24 15.24,24.13 10.41,24.13 10.29,24 | 15.37,24 43.A | 20.45,24 20.32,24.13 15.49,24.13 15.37,24 | 20.45,24 44.A | 25.53,24 25.4,24.13 20.57,24.13 20.45,24 | 25.53,24 45.A | 30.61,24 30.48,24.13 25.65,24.13 25.53,24 | 30.61,24 46.A | 35.69,24 35.56,24.13 30.73,24.13 30.61,24 | 35.69,24 47.A | 40.77,24 40.64,24.13 35.81,24.13 35.69,24 | 40.77,24 48.A | 45.85,24 45.72,24.13 40.89,24.13 40.77,24 | 45.85,24 49.A | 50.93,24 50.8,24.13 45.97,24.13 45.85,24 | 50.93,24 4A.A | 56.01,24 55.88,24.13 51.05,24.13 50.93,24 | 56.01,24 4B.A | 61.09,24 60.96,24.13 56.13,24.13 56.01,24 | 61.09,24 4C.A | 66.17,24 66.04,24.13 61.21,24.13 61.09,24 | 66.17,24 4D.A | 71.25,24 71.12,24.13 66.29,24.13 66.17,24 | 71.25,24 4E.A | 4F.A 76.2,24.13 71.37,24.13 71.25,24
R5
  Top 0.381: RH2.11 33.02,6.35 33.02,26.67 56.A
  Bottom 0.381: 50.A 2.54,29.21 5.08,29.21 5.21,29.08 | 51.A 5.21,29.08 | 10.29,29.08 10.16,29.21 5.33,29.21 5.21,29.08 | 10.29,29.08 52.A | 15.37,29.08 15.24,29.21 10.41,29.21 10.29,29.08 | 15.37,29.08 53.A | 20.45,29.08 20.32,29.21 15.49,29.21 15.37,29.08 | 20.45,29.08 54.A | 25.53,29.08 25.4,29.21 20.57,29.21 20.45,29.08 | 25.53,29.08 55.A | 30.61,29.08 30.48,29.21 25.65,29.21 25.53,29.08 | 30.61,29.08 56.A | 35.69,29.08 35.56,29.21 30.73,29.21 30.61,29.08 | 35.69,29.08 57.A | 40.77,29.08 40.64,29.21 35.81,29.21 35.69,29.08 | 40.77,29.08 58.A | 45.85,29.08 45.72,29.21 40.89,29.21 40.77,29.08 | 45.85,29.08 59.A | 50.93,29.08 50.8,29.21 45.97,29.21 45.85,29.08 | 50.93,29.08 5A.A | 56.01,29.08 55.88,29.21 51.05,29.21 50.93,29.08 | 56.01,29.08 5B.A | 61.09,29.08 60.96,29.21 56.13,29.21 56.01,29.08 | 61.09,29.08 5C.A | 66.17,29.08 66.04,29.21 61.21,29.21 61.09,29.08 | 66.17,29.08 5D.A | 71.25,29.08 71.12,29.21 66.29,29.21 66.17,29.08 | 71.25,29.08 5E.A | 5F.A 76.2,29.21 71.37,29.21 71.25,29.08
R6
  Top 0.381: RH2.10 38.1,6.35 38.1,31.75 67.A
  Bottom 0.381: 60.A 2.54,34.29 5.08,34.29 5.21,34.16 | 61.A 5.21,34.16 | 10.29,34.16 10.16,34.29 5.33,34.29 5.21,34.16 | 10.29,34.16 62.A | 15.37,34.16 15.24,34.29 10.41,34.29 10.29,34.16 | 15.37,34.16 63.A | 20.45,34.16 20.32,34.29 15.49,34.29 15.37,34.16 | 20.45,34.16 64.A | 25.53,34.16 25.4,34.29 20.57,34.29 20.45,34.16 | 25.53,34.16 65.A | 30.61,34.16 30.48,34.29 25.65,34.29 25.53,34.16 | 30.61,34.16 66.A | 35.69,34.16 35.56,34.29 30.73,34.29 30.61,34.16 | 35.69,34.16 67.A | 40.77,34.16 40.64,34.29 35.81,34.29 35.69,34.16 | 40.77,34.16 68.A | 45.85,34.16 45.72,34.29 40.89,34.29 40.77,34.16 | 45.85,34.16 69.A | 50.93,34.16 50.8,34.29 45.97,34.29 45.85,34.16 | 50.93,34.16 6A.A | 56.01,34.16 55.88,34.29 51.05,34.29 50.93,34.16 | 56.01,34.16 6B.A | 61.09,34.16 60.96,34.29 56.13,34.29 56.01,34.16 | 61.09,34.16 6C.A | 66.17,34.16 66.04,34.29 61.21,34.29 61.09,34.16 | 66.17,34.16 6D.A | 71.25,34.16 71.12,34.29 66.29,34.29 66.17,34.16 | 71.25,34.16 6E.A | 6F.A 76.2,34.29 71.37,34.29 71.25,34.16
R7
  Top 0.381: RH2.9 40.64,6.35 40.64,36.83 78.A
  Bottom 0.381: 70.A 2.54,36.83 5.08,36.83 5.21,36.96 | 71.A 5.21,36.96 | 10.29,36.96 10.16,36.83 5.33,36.83 5.21,36.96 | 10.29,36.96 72.A | 15.37,36.96 15.24,36.83 10.41,36.83 10.29,36.96 | 15.37,36.96 73.A | 20.45,36.96 20.32,36.83 15.49,36.83 15.37,36.96 | 20.45,36.96 74.A | 25.53,36.96 25.4,36.83 20.57,36.83 20.45,36.96 | 25.53,36.96 75.A | 30.61,36.96 30.48,36.83 25.65,36.83 25.53,36.96 | 30.61,36.96 76.A | 35.69,36.96 35.56,36.83 30.73,36.83 30.61,36.96 | 35.69,36.96 77.A | 40.77,36.96 40.64,36.83 35.81,36.83 35.69,36.96 | 40.77,36.96 78.A | 45.85,36.96 45.72,36.83 40.89,36.83 40.77,36.96 | 45.85,36.96 79.A | 50.93,36.96 50.8,36.83 45.97,36.83 45.85,36.96 | 50.93,36.96 7A.A | 56.01,36.96 55.88,36.83 51.05,36.83 50.93,36.96 | 56.01,36.96 7B.A | 61.09,36.96 60.96,36.83 56.13,36.83 56.01,36.96 | 61.09,36.96 7C.A | 66.17,36.96 66.04,36.83 61.21,36.83 61.09,36.96 | 66.17,36.96 7D.A | 71.25,36.96 71.12,36.83 66.29,36.83 66.17,36.96 | 71.25,36.96 7E.A | 7F.A 76.2,36.83 71.37,36.83 71.25,36.96
R8
  Top 0.381: RH2.8 43.18,3.81 43.18,2.16 44.07,1.27 45.72,1.27 45.72,41.91 89.A
  Bottom 0.381: 80.A 2.54,44.45 5.08,44.45 5.21,44.32 | 81.A 5.21,44.32 | 10.29,44.32 10.16,44.45 5.33,44.45 5.21,44.32 | 10.29,44.32 82.A | 15.37,44.32 15.24,44.45 10.41,44.45 10.29,44.32 | 15.37,44.32 83.A | 20.45,44.32 20.32,44.45 15.49,44.45 15.37,44.32 | 20.45,44.32 84.A | 25.53,44.32 25.4,44.45 20.57,44.45 20.45,44.32 | 25.53,44.32 85.A | 30.61,44.32 30.48,44.45 25.65,44.45 25.53,44.32 | 30.61,44.32 86.A | 35.69,44.32 35.56,44.45 30.73,44.45 30.61,44.32 | 35.69,44.32 87.A | 40.77,44.32 40.64,44.45 35.81,44.45 35.69,44.32 | 40.77,44.32 88.A | 45.85,44.32 45.72,44.45 40.89,44.45 40.77,44.32 | 45.85,44.32 89.A | 50.93,44.32 50.8,44.45 45.97,44.45 45.85,44.32 | 50.93,44.32 8A.A | 56.01,44.32 55.88,44.45 51.05,44.45 50.93,44.32 | 56.01,44.32 8B.A | 61.09,44.32 60.96,44.45 56.13,44.45 56.01,44.32 | 61.09,44.32 8C.A | 66.17,44.32 66.04,44.45 61.21,44.45 61.09,44.32 | 66.17,44.32 8D.A | 71.25,44.32 71.12,44.45 66.29,44.45 66.17,44.32 | 71.25,44.32 8E.A | 8F.A 76.2,44.45 71.37,44.45 71.25,44.32
R9
  Top 0.381: RH2.7 43.18,6.35 43.18,39.37 43.56,39.75 43.56,42.42 43.18,42.8 43.18,46.99 98.A
  Bottom 0.381: 90.A 2.54,49.53 5.08,49.53 5.21,49.4 | 91.A 5.21,49.4 | 10.29,49.4 10.16,49.53 5.33,49.53 5.21,49.4 | 10.29,49.4 92.A | 15.37,49.4 15.24,49.53 10.41,49.53 10.29,49.4 | 15.37,49.4 93.A | 20.45,49.4 20.32,49.53 15.49,49.53 15.37,49.4 | 20.45,49.4 94.A | 25.53,49.4 25.4,49.53 20.57,49.53 20.45,49.4 | 25.53,49.4 95.A | 30.61,49.4 30.48,49.53 25.65,49.53 25.53,49.4 | 30.61,49.4 96.A | 35.69,49.4 35.56,49.53 30.73,49.53 30.61,49.4 | 35.69,49.4 97.A | 40.77,49.4 40.64,49.53 35.81,49.53 35.69,49.4 | 40.77,49.4 98.A | 45.85,49.4 45.72,49.53 40.89,49.53 40.77,49.4 | 45.85,49.4 99.A | 50.93,49.4 50.8,49.53 45.97,49.53 45.85,49.4 | 50.93,49.4 9A.A | 56.01,49.4 55.88,49.53 51.05,49.53 50.93,49.4 | 56.01,49.4 9B.A | 61.09,49.4 60.96,49.53 56.13,49.53 56.01,49.4 | 61.09,49.4 9C.A | 66.17,49.4 66.04,49.53 61.21,49.53 61.09,49.4 | 66.17,49.4 9D.A | 71.25,49.4 71.12,49.53 66.29,49.53 66.17,49.4 | 71.25,49.4 9E.A | 9F.A 76.2,49.53 71.37,49.53 71.25,49.4
R10
  Top 0.381: RH2.6 48.26,6.35 48.26,52.07 A9.A
  Bottom 0.381: A0.A 2.54,54.61 5.08,54.61 5.21,54.48 | A1.A 5.21,54.48 | 10.29,54.48 10.16,54.61 5.33,54.61 5.21,54.48 | 10.29,54.48 A2.A | 15.37,54.48 15.24,54.61 10.41,54.61 10.29,54.48 | 15.37,54.48 A3.A | 20.45,54.48 20.32,54.61 15.49,54.61 15.37,54.48 | 20.45,54.48 A4.A | 25.53,54.48 25.4,54.61 20.57,54.61 20.45,54.48 | 25.53,54.48 A5.A | 30.61,54.48 30.48,54.61 25.65,54.61 25.53,54.48 | 30.61,54.48 A6.A | 35.69,54.48 35.56,54.61 30.73,54.61 30.61,54.48 | 35.69,54.48 A7.A | 40.77,54.48 40.64,54.61 35.81,54.61 35.69,54.48 | 40.77,54.48 A8.A | 45.85,54.48 45.72,54.61 40.89,54.61 40.77,54.48 | 45.85,54.48 A9.A | 50.93,54.48 50.8,54.61 45.97,54.61 45.85,54.48 | 50.93,54.48 AA.A | 56.01,54.48 55.88,54.61 51.05,54.61 50.93,54.48 | 56.01,54.48 AB.A | 61.09,54.48 60.96,54.61 56.13,54.61 56.01,54.48 | 61.09,54.48 AC.A | 66.17,54.48 66.04,54.61 61.21,54.61 61.09,54.48 | 66.17,54.48 AD.A | 71.25,54.48 71.12,54.61 66.29,54.61 66.17,54.48 | 71.25,54.48 AE.A | AF.A 76.2,54.61 71.37,54.61 71.25,54.48
R11
  Top 0.381: RH2.5 50.8,6.35 50.8,57.15 BA.A
  Bottom 0.381: B0.A 2.54,59.69 5.08,59.69 5.21,59.56 | B1.A 5.21,59.56 | 10.29,59.56 10.16,59.69 5.33,59.69 5.21,59.56 | 10.29,59.56 B2.A | 15.37,59.56 15.24,59.69 10.41,59.69 10.29,59.56 | 15.37,59.56 B3.A | 20.45,59.56 20.32,59.69 15.49,59.69 15.37,59.56 | 20.45,59.56 B4.A | 25.53,59.56 25.4,59.69 20.57,59.69 20.45,59.56 | 25.53,59.56 B5.A | 30.61,59.56 30.48,59.69 25.65,59.69 25.53,59.56 | 30.61,59.56 B6.A | 35.69,59.56 35.56,59.69 30.73,59.69 30.61,59.56 | 35.69,59.56 B7.A | 40.77,59.56 40.64,59.69 35.81,59.69 35.69,59.56 | 40.77,59.56 B8.A | 45.85,59.56 45.72,59.69 40.89,59.69 40.77,59.56 | 45.85,59.56 B9.A | 50.93,59.56 50.8,59.69 45.97,59.69 45.85,59.56 | 50.93,59.56 BA.A | 56.01,59.56 55.88,59.69 51.05,59.69 50.93,59.56 | 56.01,59.56 BB.A | 61.09,59.56 60.96,59.69 56.13,59.69 56.01,59.56 | 61.09,59.56 BC.A | 66.17,59.56 66.04,59.69 61.21,59.69 61.09,59.56 | 66.17,59.56 BD.A | 71.25,59.56 71.12,59.69 66.29,59.69 66.17,59.56 | 71.25,59.56 BE.A | BF.A 76.2,59.69 71.37,59.69 71.25,59.56
R12
  Top 0.381: RH2.4 50.8,3.81 50.8,2.16 51.69,1.27 55.88,1.27 55.88,62.23 CB.A
  Bottom 0.381: C0.A 2.54,64.77 5.08,64.77 5.21,64.64 | C1.A 5.21,64.64 | 10.29,64.64 10.16,64.77 5.33,64.77 5.21,64.64 | 10.29,64.64 C2.A | 15.37,64.64 15.24,64.77 10.41,64.77 10.29,64.64 | 15.37,64.64 C3.A | 20.45,64.64 20.32,64.77 15.49,64.77 15.37,64.64 | 20.45,64.64 C4.A | 25.53,64.64 25.4,64.77 20.57,64.77 20.45,64.64 | 25.53,64.64 C5.A | 30.61,64.64 30.48,64.77 25.65,64.77 25.53,64.64 | 30.61,64.64 C6.A | 35.69,64.64 35.56,64.77 30.73,64.77 30.61,64.64 | 35.69,64.64 C7.A | 40.77,64.64 40.64,64.77 35.81,64.77 35.69,64.64 | 40.77,64.64 C8.A | 45.85,64.64 45.72,64.77 40.89,64.77 40.77,64.64 | 45.85,64.64 C9.A | 50.93,64.64 50.8,64.77 45.97,64.77 45.85,64.64 | 50.93,64.64 CA.A | 56.01,64.64 55.88,64.77 51.05,64.77 50.93,64.64 | 56.01,64.64 CB.A | 61.09,64.64 60.96,64.77 56.13,64.77 56.01,64.64 | 61.09,64.64 CC.A | 66.17,64.64 66.04,64.77 61.21,64.77 61.09,64.64 | 66.17,64.64 CD.A | 71.25,64.64 71.12,64.77 66.29,64.77 66.17,64.64 | 71.25,64.64 CE.A | CF.A 76.2,64.77 71.37,64.77 71.25,64.64
R13  (via drill 0.61)
  Top 0.381: v53.34,8.38 53.34,60.58 50.8,63.12 50.8,67.31 DA.A
  Bottom 0.381: D0.A 2.54,69.85 5.08,69.85 5.21,69.72 | D1.A 5.21,69.72 | 10.29,69.72 10.16,69.85 5.33,69.85 5.21,69.72 | 10.29,69.72 D2.A | 15.37,69.72 15.24,69.85 10.41,69.85 10.29,69.72 | 15.37,69.72 D3.A | 20.45,69.72 20.32,69.85 15.49,69.85 15.37,69.72 | 20.45,69.72 D4.A | 25.53,69.72 25.4,69.85 20.57,69.85 20.45,69.72 | 25.53,69.72 D5.A | 30.61,69.72 30.48,69.85 25.65,69.85 25.53,69.72 | 30.61,69.72 D6.A | 35.69,69.72 35.56,69.85 30.73,69.85 30.61,69.72 | 35.69,69.72 D7.A | 40.77,69.72 40.64,69.85 35.81,69.85 35.69,69.72 | 40.77,69.72 D8.A | 45.85,69.72 45.72,69.85 40.89,69.85 40.77,69.72 | 45.85,69.72 D9.A | 50.93,69.72 50.8,69.85 45.97,69.85 45.85,69.72 | 50.93,69.72 DA.A | 56.01,69.72 55.88,69.85 51.05,69.85 50.93,69.72 | 56.01,69.72 DB.A | 61.09,69.72 60.96,69.85 56.13,69.85 56.01,69.72 | 61.09,69.72 DC.A | 66.17,69.72 66.04,69.85 61.21,69.85 61.09,69.72 | 66.17,69.72 DD.A | 71.25,69.72 71.12,69.85 66.29,69.85 66.17,69.72 | 71.25,69.72 DE.A | DF.A 76.2,69.85 71.37,69.85 71.25,69.72 | RH2.3 53.34,6.35 v53.34,8.38
R14
  Top 0.381: RH2.2 58.42,6.35 58.42,72.39 EB.A
  Bottom 0.381: E0.A 2.54,72.39 5.08,72.39 5.21,72.52 | E1.A 5.21,72.52 | 5.21,72.52 5.33,72.39 10.16,72.39 E2.A 12.7,74.93 15.24,74.93 E3.A 17.78,72.39 20.32,72.39 E4.A 22.86,72.39 24.64,72.39 25.78,73.53 26.54,73.53 E5.A 27.94,72.39 30.48,72.39 30.61,72.52 | E6.A 30.61,72.52 | 35.69,72.52 35.56,72.39 30.73,72.39 30.61,72.52 | 35.69,72.52 E7.A | 40.77,72.52 40.64,72.39 35.81,72.39 35.69,72.52 | 40.77,72.52 E8.A | 45.85,72.52 45.72,72.39 40.89,72.39 40.77,72.52 | 45.85,72.52 E9.A | 50.93,72.52 50.8,72.39 45.97,72.39 45.85,72.52 | 50.93,72.52 EA.A | 56.01,72.52 55.88,72.39 51.05,72.39 50.93,72.52 | 56.01,72.52 EB.A | 61.09,72.52 60.96,72.39 56.13,72.39 56.01,72.52 | 61.09,72.52 EC.A | 66.17,72.52 66.04,72.39 61.21,72.39 61.09,72.52 | 66.17,72.52 ED.A | 71.25,72.52 71.12,72.39 66.29,72.39 66.17,72.52 | 71.25,72.52 EE.A | EF.A 76.2,72.39 71.37,72.39 71.25,72.52
R15  (via drill 0.61)
  Top 0.381: v65.79,6.35 66.04,6.6 66.04,77.47 FD.A
  Bottom 0.381: F0.A 2.54,80.01 5.08,80.01 5.21,79.88 | F1.A 5.21,79.88 | 10.29,79.88 10.16,80.01 5.33,80.01 5.21,79.88 | 10.29,79.88 F2.A | 15.37,79.88 15.24,80.01 10.41,80.01 10.29,79.88 | 15.37,79.88 F3.A | 20.45,79.88 20.32,80.01 15.49,80.01 15.37,79.88 | 20.45,79.88 F4.A | 25.53,79.88 25.4,80.01 20.57,80.01 20.45,79.88 | 25.53,79.88 F5.A | 30.61,79.88 30.48,80.01 25.65,80.01 25.53,79.88 | 30.61,79.88 F6.A | 35.69,79.88 35.56,80.01 30.73,80.01 30.61,79.88 | 35.69,79.88 F7.A | 40.77,79.88 40.64,80.01 35.81,80.01 35.69,79.88 | 40.77,79.88 F8.A | 45.85,79.88 45.72,80.01 40.89,80.01 40.77,79.88 | 45.85,79.88 F9.A | 50.93,79.88 50.8,80.01 45.97,80.01 45.85,79.88 | 50.93,79.88 FA.A | 56.01,79.88 55.88,80.01 51.05,80.01 50.93,79.88 | 56.01,79.88 FB.A | 61.09,79.88 60.96,80.01 56.13,80.01 56.01,79.88 | 61.09,79.88 FC.A | 66.17,79.88 66.04,80.01 61.21,80.01 61.09,79.88 | 66.17,79.88 FD.A | 71.25,79.88 71.12,80.01 66.29,80.01 66.17,79.88 | 71.25,79.88 FE.A | FF.A 76.2,80.01 71.37,80.01 71.25,79.88 | RH2.1 60.96,6.35 v65.79,6.35